# EAGLE board Vorlage ATmega644PA (EAGLE 6.4)
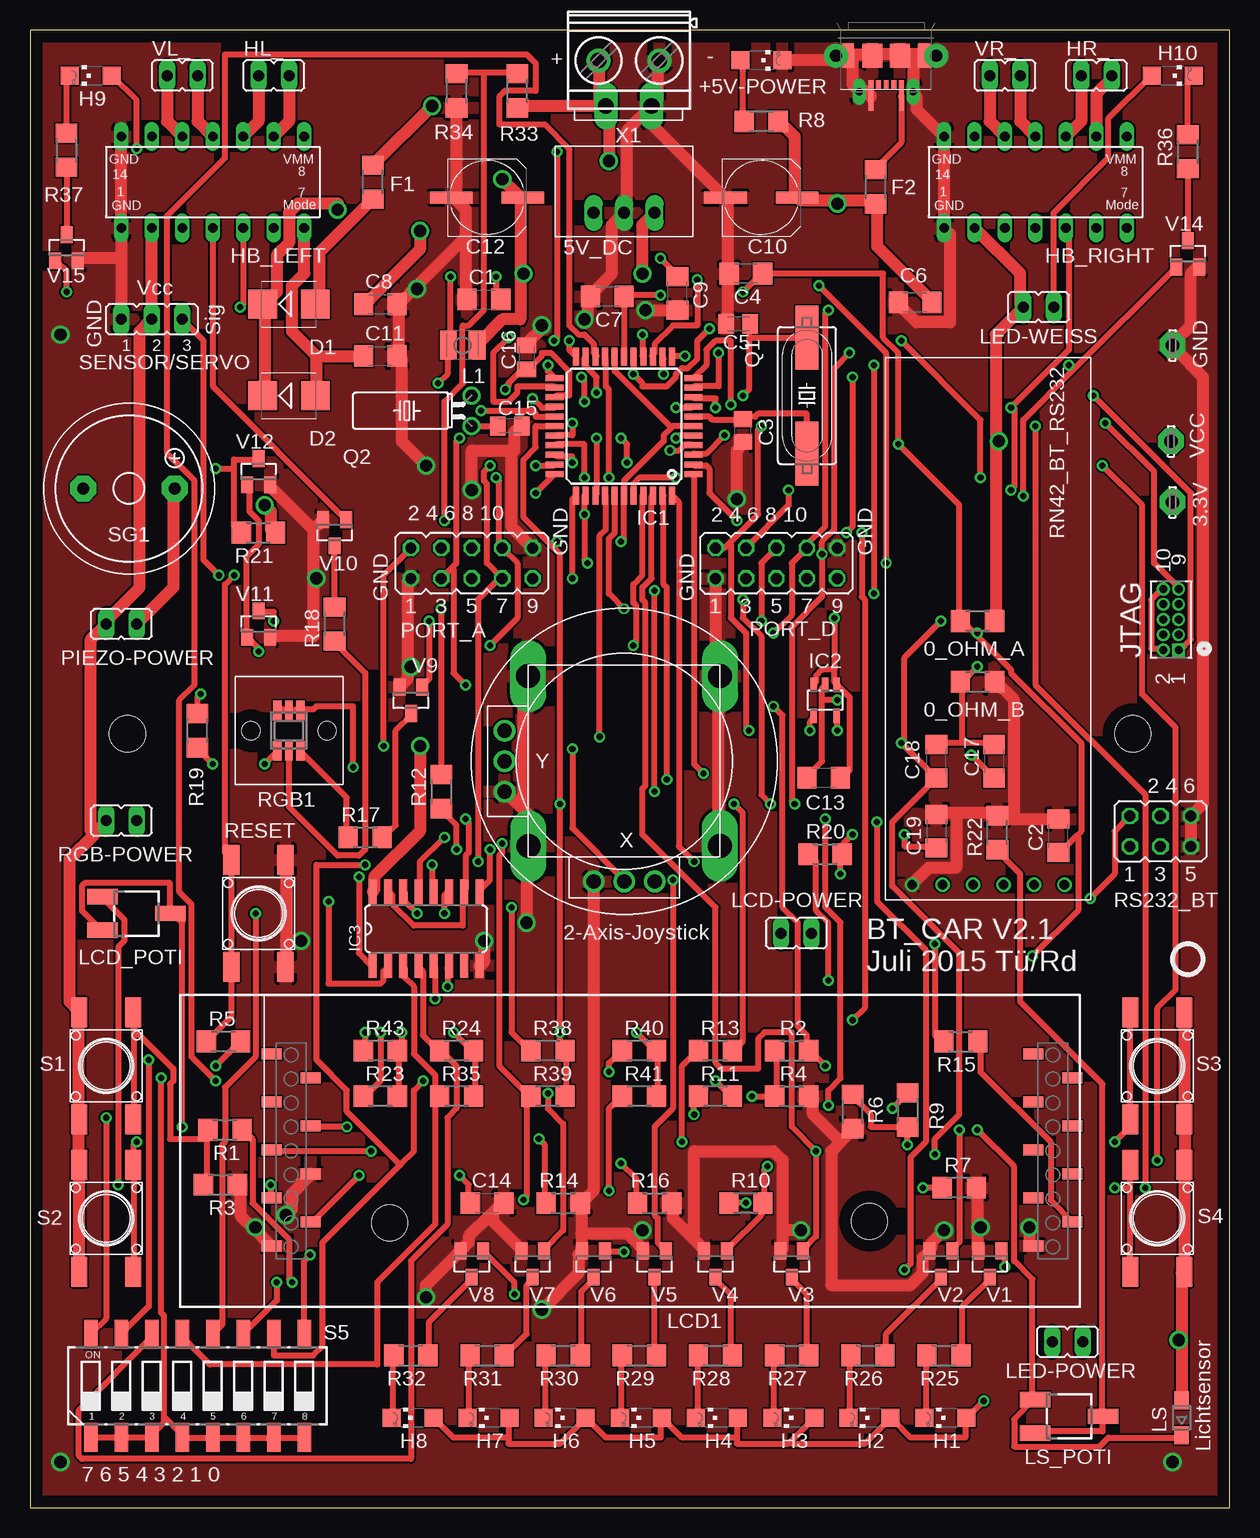
[diagram p0: board, top side]
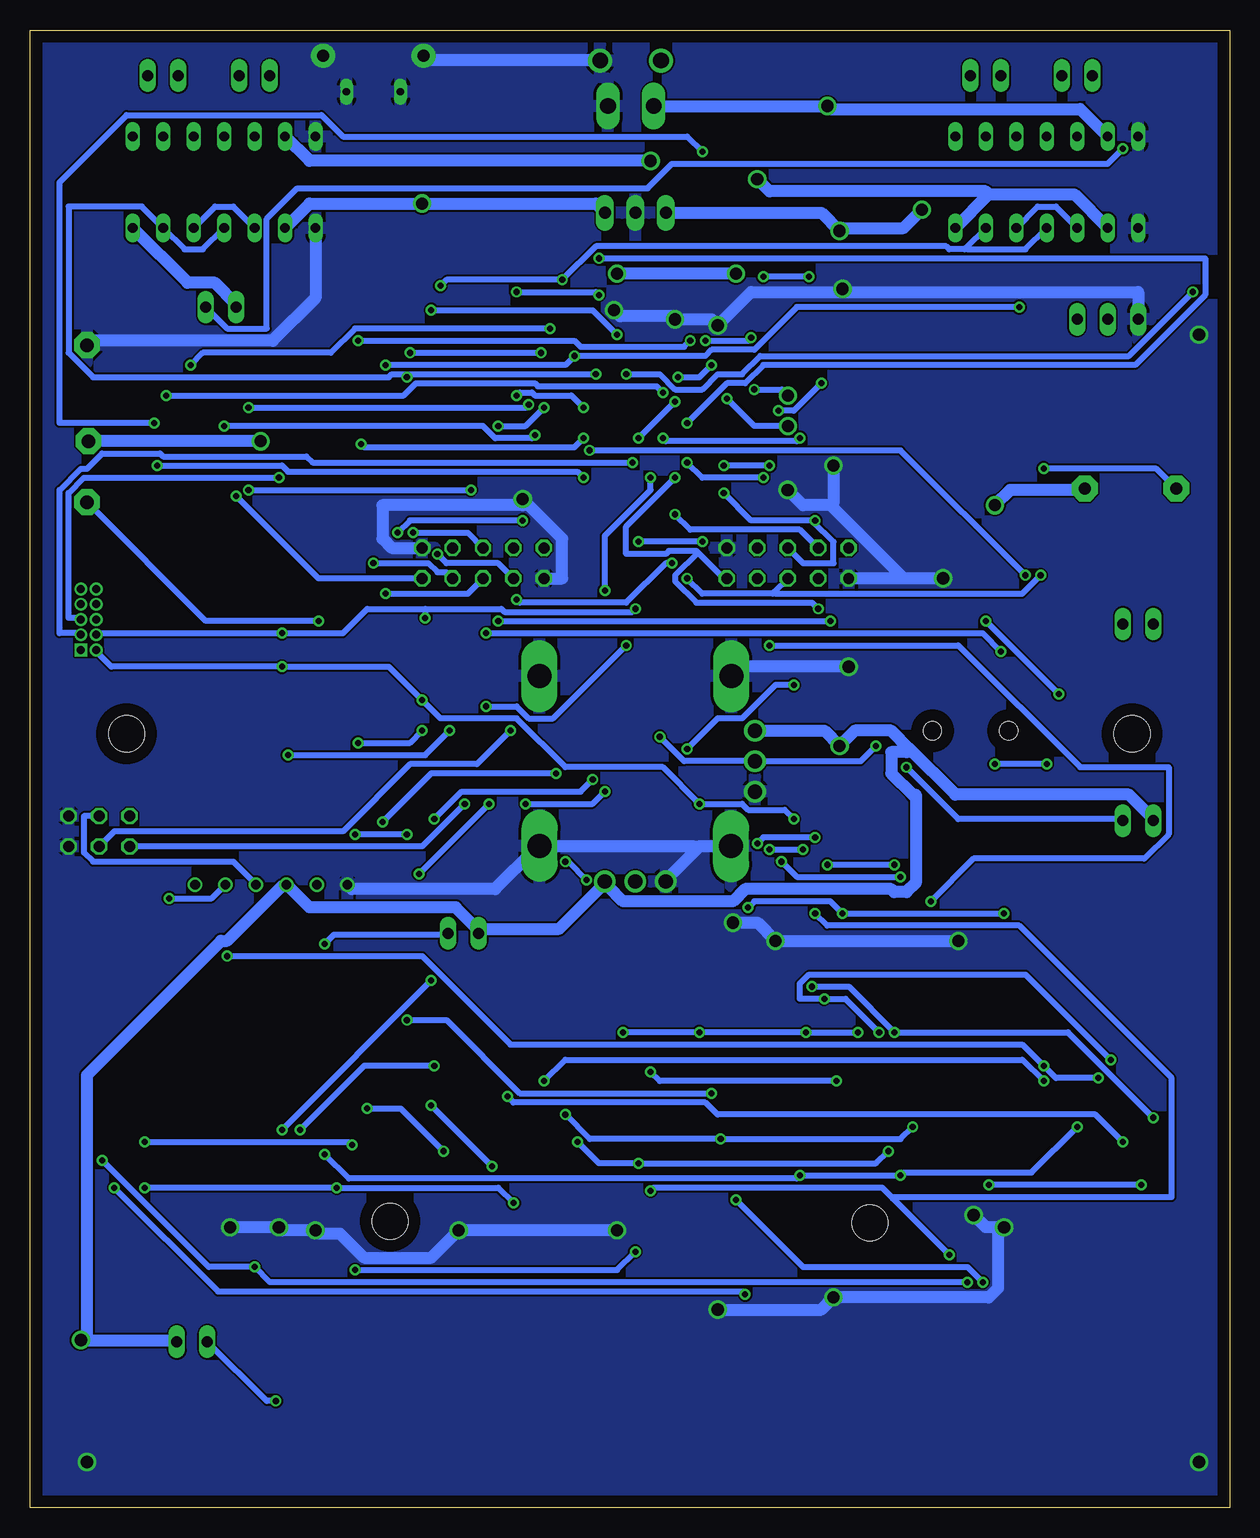
[diagram p1: board, bottom side, seen from below]

Size 100 x 123.18 mm. Coordinates in mm from the lower left corner, seen from the top.
Outline: 0,0 100,0 100,123.18 0,123.18 0,0
Copper layers (1*16): Top 0.035mm / dielectric 1.5mm / Bottom 0.035mm
Design rules "default *": minimum track width 10mil, minimum drill 20mil, track to track 6mil, track to pad 6mil, pad to pad 6mil, via to via 6mil, smd to smd 0mil, copper to edge 40mil, drill to drill 8mil, minimum pad ring 8mil, minimum via ring 8mil, stop-mask expansion 4mil, vias tented up to drill 0mil, thermal gap 10mil
Net classes: 0 default: width 0.508 mm, drill 0.508 mm; 1 POWER: width 1.016 mm, drill 1.016 mm
Holes 3 mm at 8.13,64.52 91.95,64.52 29.97,23.75 69.98,23.88

## Footprints (pad centres in the part's own frame; a part is rotated, then mirrored left to right if it is on the bottom)
R1206 = smd 1.6 x 1.803: 1 -1.422,0; 2 1.422,0
LSP11 = drill 1.118 pad 2.159 octagon: MP 0,0
RECOM_DCDC = drill 1 long: GND 0,0; IN -2.54,0; OUT 2.54,0
CHIPLED_1206 = smd 1.5 x 1.5: A 0,-1.75; C 0,1.75
C1206 = smd 1.6 x 1.8: 1 -1.4,0; 2 1.4,0
C0805 = smd 1.3 x 1.5: 1 -0.95,0; 2 0.95,0
C0805K = smd 1.3 x 1.6: 1 -1,0; 2 1,0
UD-6,3X5,8_NICHICON = smd 3.556 x 1: + 2.985,0; - -2.985,0
SMB = smd 2.4 x 2.4: A 2.2,0; C -2.2,0
F1206 = smd 1.6 x 1.803: 1 -1.422,0; 2 1.422,0
DIL14 = drill 0.813 long: 1 -7.62,-3.81; 2 -5.08,-3.81; 3 -2.54,-3.81; 4 0,-3.81; 5 2.54,-3.81; 6 5.08,-3.81; 7 7.62,-3.81; 8 7.62,3.81; 9 5.08,3.81; 10 2.54,3.81; 11 0,3.81; 12 -2.54,3.81; 13 -5.08,3.81; 14 -7.62,3.81
JP1 = drill 0.914 long: 1 0,-1.27; 2 0,1.27
TQFP44 = smd 1.5 x 0.5: 1 -5.8,4; 2 -5.8,3.2; 3 -5.8,2.4; 4 -5.8,1.6; 5 -5.8,0.8; 6 -5.8,0; 7 -5.8,-0.8; 8 -5.8,-1.6; 9 -5.8,-2.4; 10 -5.8,-3.2; 11 -5.8,-4; 23 5.8,-4; 24 5.8,-3.2; 25 5.8,-2.4; 26 5.8,-1.6; 27 5.8,-0.8; 28 5.8,0; 29 5.8,0.8; 30 5.8,1.6; 31 5.8,2.4; 32 5.8,3.2; 33 5.8,4 | smd 0.5 x 1.5: 12 -4,-5.8; 13 -3.2,-5.8; 14 -2.4,-5.8; 15 -1.6,-5.8; 16 -0.8,-5.8; 17 0,-5.8; 18 0.8,-5.8; 19 1.6,-5.8; 20 2.4,-5.8; 21 3.2,-5.8; 22 4,-5.8; 34 4,5.8; 35 3.2,5.8; 36 2.4,5.8; 37 1.6,5.8; 38 0.8,5.8; 39 0,5.8; 40 -0.8,5.8; 41 -1.6,5.8; 42 -2.4,5.8; 43 -3.2,5.8; 44 -4,5.8
SOT23-DBV = smd 0.55 x 1.2: 1 -0.95,-1.3; 2 0,-1.3; 3 0.95,-1.3; 4 0.95,1.3; 5 -0.95,1.3
SO16 = smd 0.66 x 2.032: 1 -4.445,-3.073; 2 -3.175,-3.073; 3 -1.905,-3.073; 4 -0.635,-3.073; 5 0.635,-3.073; 6 1.905,-3.073; 7 3.175,-3.073; 8 4.445,-3.073; 9 4.445,3.073; 10 3.175,3.073; 11 1.905,3.073; 12 0.635,3.073; 13 -0.635,3.073; 14 -1.905,3.073; 15 -3.175,3.073; 16 -4.445,3.073
SAMTEC_FTS-105-01-L-D = drill 0.66 square: 1 -5.08,-1.27 | drill 0.66: 2 -5.08,0; 3 -3.81,-1.27; 4 -3.81,0; 5 -2.54,-1.27; 6 -2.54,0; 7 -1.27,-1.27; 8 -1.27,0; 9 0,-1.27; 10 0,0
L2825P = smd 1.4 x 2.4: 1 -1.2,0; 2 1.2,0
EADIP203-4SMD = smd 1.67 x 0.89: 1 -29.38,-9.92; 2 -26.13,-7.92; 3 -29.38,-5.92; 4 -26.13,-3.92; 5 -29.38,-1.92; 6 -26.13,0.08; 7 -29.38,2.08; 8 -26.13,4.08; 9 -29.38,6.08; 10 34.12,6.08; 11 37.37,4.08; 12 34.12,2.08; 13 37.37,0.08; 14 34.12,-1.92; 15 37.37,-3.92; 16 34.12,-5.92; 17 37.37,-7.92; 18 34.12,-9.92
3223G = smd 2.54 x 1.27: 1 -2.835,1.4; 2 2.835,0; 3 -2.835,-1.4
SOD232-W = smd 1.5 x 1.2: C 1.45,0; E -1.45,0
JP5Q = drill 0.914 octagon: 1 -5.08,-1.27; 2 -5.08,1.27; 3 -2.54,-1.27; 4 -2.54,1.27; 5 0,-1.27; 6 0,1.27; 7 2.54,-1.27; 8 2.54,1.27; 9 5.08,-1.27; 10 5.08,1.27
HC49UP = smd 5.334 x 1.93: 1 -4.826,0; 2 4.826,0
TC38H = drill 1: 1 -1.27,0; 2 1.27,0
TS42_4PAD = smd 2.54 x 1.4: 1 -4.454,2.25; 2 4.454,2.25; 3 -4.454,-2.25; 4 4.454,-2.25
LED_MIT_DIFUSOR = smd 0.7 x 1.65: 1 -0.95,-1.675; 3 0.95,-1.675; 4 0.95,1.675; 6 -0.95,1.675 | smd 0.6 x 1.65: 2 0,-1.675; 5 0,1.675 | hole 1.5: -3.175,0; 3.175,0
RN42BT_RS232 = drill 0.8: 1 22.86,-6.35; 2 22.86,-3.81; 3 22.86,-1.27; 4 22.86,1.27; 5 22.86,3.81; 6 22.86,6.35
JP3Q = drill 0.914 octagon: 1 -2.54,-1.27; 2 -2.54,1.27; 3 0,-1.27; 4 0,1.27; 5 2.54,-1.27; 6 2.54,1.27
CTS-219-08 = smd 1.13 x 2.44: 1 -8.89,-4.3; 2 -6.35,-4.3; 3 -3.81,-4.3; 4 -1.27,-4.3; 5 1.27,-4.3; 6 3.81,-4.3; 7 6.35,-4.3; 8 8.89,-4.3; 9 8.89,4.3; 10 6.35,4.3; 11 3.81,4.3; 12 1.27,4.3; 13 -1.27,4.3; 14 -3.81,4.3; 15 -6.35,4.3; 16 -8.89,4.3
JP2 = drill 0.914 long: 1 -2.54,0; 2 0,0; 3 2.54,0
F/TMB = drill 1.016 pad 2.159 octagon: + 3.81,0; - -3.81,0
47589-0001 = smd 2.54 x 0.4: 1 3.308,1.275; 5 3.308,-1.275 | smd 0.762 x 0.4: 2 2.419,0.65; 3 2.419,0; 4 2.419,-0.65 | drill 1 pad 2: CASING1 0,4.175; CASING2 0,-4.175 | drill 0.6 pad 1.1 long: CASING3 3,2.25; CASING4 3,-2.25 | smd 2.032 x 1.016: CASING5 0,3.175; CASING8 0,-3.175 | smd 2.032 x 1.651: CASING6 0,1.143; CASING7 0,-1.143
2-AXIS-JOYSTICK = drill 2 long: CASE1 -8.008,7.077; CASE2 -7.978,-7.077; CASE3 8.008,7.077; CASE4 7.987,-7.067 | drill 1.2: L/R+ 2.54,-10.03; L/R- -2.54,-10.03; L/R_M 0,-10.03; U/D+ -9.97,2.54; U/D- -9.97,-2.54; U/D_M -9.97,0
SOT23 = smd 1 x 1.4: 1 -0.95,-1.1; 2 0.95,-1.1; 3 0,1.1
MKDSN1,5/2-5,08 = drill 1.3 pad 2: 1.1 -2.561,0.025; 2.1 2.519,0.025 | drill 1.3 long: 1.2 -1.905,3.81; 2.2 1.905,3.81

## Placement (x,y rotation side)
0_OHM_A  0 Ohm  [R1206]  78.99,73.91 180 top
0_OHM_B  0 Ohm  [R1206]  78.99,68.83 180 top
3.3V  3.3V  [LSP11]  95.25,83.82 90 top
5V_DC  RECOM_DCDC  [RECOM_DCDC]  49.53,107.95 0 top
+5V-POWER  Gruen  [CHIPLED_1206]  60.96,120.65 270 top
C1  100nF  [C1206]  37.85,100.71 0 top
C2  100nF  [C1206]  85.72,56.01 90 top
C3  18pF  [C0805]  59.44,89.79 90 top
C4  100nF  [C1206]  59.69,102.87 180 top
C5  18pF  [C0805K]  59.05,98.68 180 top
C6  100nF  [C1206]  73.79,100.46 180 top
C7  100nF  [C1206]  48.13,100.97 180 top
C8  100nF  [C1206]  29.21,100.33 0 top
C9  100nF  [C1206]  53.98,101.22 90 top
C10  100uF  [UD-6,3X5,8_NICHICON]  60.96,109.22 0 top
C11  100nF  [C1206]  29.21,96.01 0 top
C12  100uF  [UD-6,3X5,8_NICHICON]  38.1,109.22 0 top
C13  1uF  [C1206]  66.17,60.83 180 top
C14  100nF  [C1206]  38.1,25.4 0 top
C15  12pF  [C0805K]  40.01,90.17 0 top
C16  12pF  [C0805K]  41.4,95.89 90 top
C17  100nF  [C1206]  80.39,62.23 90 top
C18  1uF  [C1206]  75.56,62.23 90 top
C19  1uF  [C1206]  75.56,56.39 270 top
D1  MBRS130LT3  [SMB]  21.59,100.33 0 top
D2  MBRS130LT3  [SMB]  21.59,92.71 0 top
F1  1.0A  [F1206]  28.57,110.49 270 top
F2  500mA  [F1206]  70.48,110.11 270 top
GND  3.3V  [LSP11]  95.25,96.9 90 top
H1  rot  [CHIPLED_1206]  76.33,7.49 90 top
H2  blau  [CHIPLED_1206]  69.98,7.49 90 top
H3  rot  [CHIPLED_1206]  63.63,7.49 90 top
H4  blau  [CHIPLED_1206]  57.28,7.49 90 top
H5  rot  [CHIPLED_1206]  50.93,7.49 90 top
H6  blau  [CHIPLED_1206]  44.58,7.49 90 top
H7  rot  [CHIPLED_1206]  38.23,7.49 90 top
H8  blau  [CHIPLED_1206]  31.88,7.49 90 top
H9  weiss  [CHIPLED_1206]  5.08,119.38 90 top
H10  weiss  [CHIPLED_1206]  95.25,119.38 270 top
HB_LEFT  DRV8835  [DIL14]  15.24,110.49 0 top
HB_RIGHT  DRV8835  [DIL14]  83.82,110.49 0 top
HL_  [JP1]  20.32,119.38 270 top
HR_  [JP1]  88.9,119.38 270 top
IC1  ATmega644PA  [TQFP44]  49.53,90.17 180 top
IC2  LP2985-XXDBVR  [SOT23-DBV]  66.29,67.31 180 top
IC3  74AC165D  [SO16]  33.02,48.26 0 top
JTAG  FTS-105-01-L-D  [SAMTEC_FTS-105-01-L-D]  94.49,76.58 90 top
L1  10uH  [L2825P]  36.07,96.9 180 top
LCD1  EADIP203-4_SMD  [EADIP203-4SMD]  49.53,31.75 0 top
LCD-POWER  [JP1]  63.88,47.88 270 top
LCD_POTI  2k5  [3223G]  8.89,49.53 0 top
LED-POWER  [JP1]  86.49,13.84 90 top
LED-WEISS  [JP1]  84.07,100.08 270 top
LS  ALS-PT17  [SOD232-W]  96.01,7.49 90 top
LS_POTI  25k  [3223G]  86.61,7.62 0 top
PIEZO-POWER  [JP1]  7.62,73.66 270 top
PORT_A  [JP5Q]  36.83,78.74 0 top
PORT_D  [JP5Q]  62.23,78.74 0 top
Q1  16MHz  [HC49UP]  64.77,92.71 270 top
Q2  32.768kHz  [TC38H]  36.83,91.44 90 top
R1  1k  [R1206]  16.26,31.5 180 top
R2  1k  [R1206]  63.5,38.1 180 top
R3  100k  [R1206]  15.88,26.92 180 top
R4  100k  [R1206]  63.5,34.29 180 top
R5  10k  [R1206]  16.13,38.86 0 top
R6  100k  [R1206]  68.58,33.02 270 top
R7  100k  [R1206]  77.47,26.67 0 top
R8  1k  [R1206]  60.96,115.57 0 top
R9  1k  [R1206]  73.15,33.15 90 top
R10  1k  [R1206]  59.69,25.4 0 top
R11  1k  [R1206]  57.15,34.29 0 top
R12  1k  [R1206]  34.29,59.69 90 top
R13  1k  [R1206]  57.15,38.1 0 top
R14  2k  [R1206]  44.45,25.4 180 top
R15  150R  [R1206]  77.6,38.86 180 top
R16  2k  [R1206]  52.07,25.4 180 top
R17  150R  [R1206]  27.94,55.88 180 top
R18  150R  [R1206]  25.4,73.66 270 top
R19  150R  [R1206]  13.97,64.77 270 top
R20  100k  [R1206]  66.29,54.48 180 top
R21  1k  [R1206]  19.05,81.28 180 top
R22  10k  [R1206]  80.64,56.26 270 top
R23  100k  [R1206]  29.21,34.29 0 top
R24  100k  [R1206]  35.56,38.1 0 top
R25  150R  [R1206]  76.2,12.7 180 top
R26  150R  [R1206]  69.85,12.7 180 top
R27  150R  [R1206]  63.5,12.7 180 top
R28  150R  [R1206]  57.15,12.7 180 top
R29  150R  [R1206]  50.8,12.7 180 top
R30  150R  [R1206]  44.45,12.7 180 top
R31  150R  [R1206]  38.1,12.7 180 top
R32  150R  [R1206]  31.75,12.7 180 top
R33  100k  [R1206]  40.64,118.11 270 top
R34  100k  [R1206]  35.56,118.11 90 top
R35  100k  [R1206]  35.56,34.29 0 top
R36  150R  [R1206]  96.52,113.03 90 top
R37  150R  [R1206]  3.05,113.16 90 top
R38  100k  [R1206]  43.18,38.1 0 top
R39  100k  [R1206]  43.18,34.29 0 top
R40  100k  [R1206]  50.8,38.1 0 top
R41  100k  [R1206]  50.8,34.29 0 top
R43  100k  [R1206]  29.21,38.1 0 top
RESET  [TS42_4PAD]  19.05,49.53 270 top
RGB1  [LED_MIT_DIFUSOR]  21.59,64.77 0 top
RGB-POWER  [JP1]  7.62,57.28 270 top
RN1  RN42_BT_RS232  [RN42BT_RS232]  79.88,74.8 270 top
RS232_BT  [JP3Q]  94.23,56.39 0 top
S1  [TS42_4PAD]  6.35,36.83 270 top
S2  [TS42_4PAD]  6.35,24.13 270 top
S3  [TS42_4PAD]  93.98,36.83 270 top
S4  [TS42_4PAD]  93.98,24.13 270 top
S5  219-08  [CTS-219-08]  13.97,10.16 0 top
SENSOR/SERVO  [JP2]  10.16,99.06 0 top
SG1  F/TMB  [F/TMB]  8.26,84.96 0 top
U$1  MICRO-USB  [47589-0001]  71.37,121.03 270 top
U$6  2-AXIS-JOYSTICK  [2-AXIS-JOYSTICK]  49.53,62.23 0 top
V1  PMV20EN  [SOT23]  80.01,20.32 180 top
V2  PMV20EN  [SOT23]  75.95,20.32 180 top
V3  PMV20EN  [SOT23]  63.5,20.32 180 top
V4  PMV20EN  [SOT23]  57.15,20.32 180 top
V5  PMV20EN  [SOT23]  52.07,20.32 180 top
V6  PMV20EN  [SOT23]  46.99,20.32 180 top
V7  PMV20EN  [SOT23]  41.91,20.32 180 top
V8  PMV20EN  [SOT23]  36.83,20.32 180 top
V9  PMV20EN  [SOT23]  31.75,67.31 180 top
V10  PMV20EN  [SOT23]  25.4,81.28 180 top
V11  PMV20EN  [SOT23]  19.05,73.66 0 top
V12  PMV20EN  [SOT23]  19.05,86.36 0 top
V14  PMV20EN  [SOT23]  96.52,104.52 0 top
V15  PMV20EN  [SOT23]  3.05,105.03 0 top
VCC  3.3V  [LSP11]  95.12,88.9 90 top
VL_  [JP1]  12.7,119.38 270 top
VR_  [JP1]  81.28,119.38 270 top
X1  [MKDSN1,5/2-5,08]  49.91,120.65 180 top

## Library data of the parts
0_OHM_A 0_OHM_B C1-C9 C11 C13-C19 L1 R1-R41 R43 = rcl
3.3V GND VCC = solpad
5V_DC = DCDC
+5V-POWER H1-H10 RGB1 = led
C10 C12 = rcl2
D1 D2 = diode
F1 F2 = fuse
HB_LEFT HB_RIGHT = HBridge
HL_ HR_ LCD-POWER LED-POWER LED-WEISS PIEZO-POWER PORT_A PORT_D RGB-POWER RS232_BT SENSOR/SERVO VL_ VR_ = jumper
IC1 = atmel; MPN: ATMEGA644PV-10AU; OC_FARNELL: 1455123; OC_NEWARK: 58M3748
IC2 RESET S1-S4 = SmartPrj
IC3 = 74xx-eu
JTAG = JTAG_10pol_50mil; DESCRIPTION: CONN HEADER, 1.27MM, THRU HOLE, 10WAY; MPN: FTS-105-01-L-D; OCFARNELL: 1667728; OCNEWARK: 11P4652; PACKAGE: HEADER, 1.27MM, THRU HOLE, 10WAY; SUPPLIER: Samtec
LCD1 = display-lcd
LCD_POTI LS_POTI = pot
LS = Lichtsensor
Q1 Q2 = crystal; OC_FARNELL: unknown; OC_NEWARK: unknown
RN1 = RN42_BT_RS232
S5 = switch-dil; OC_FARNELL: unknown; OC_NEWARK: unknown
SG1 = buzzer; OC_FARNELL: unknown; OC_NEWARK: unknown
U$1 = con-molex-usb
U$6 = Joystick_2-Axis
V1-V12 V14 V15 = transistor-fet-mit-BSS138
X1 = con_sirius; MPN: MKDSN 1,5/2-5.08; OC_FARNELL: 1792903; OC_NEWARK: 30M2397

## Nets
3.3V: 3.3V.MP C14.1 C18.1 IC2.5 LCD1.2 LCD_POTI.2 LCD_POTI.3
+5V: 0_OHM_A.2 C2.1 C4.1 C7.1 C13.1 IC1.5 IC1.17 IC1.38 IC2.1 IC2.3 JTAG.4 R5.2 S5.1 S5.2 S5.3 S5.4 S5.5 S5.6 S5.7 S5.8
DGND: 0_OHM_B.2 C13.2 C17.2 C18.2 IC1.6 IC1.18 IC1.28 IC1.39 IC2.2 IC3.10 IC3.15 JTAG.2 JTAG.10 R23.2 R24.2 R35.2 R38.2 R39.2 R40.2 R41.2 R43.2
GND [POWER]: 0_OHM_B.1 5V_DC.GND +5V-POWER.C C1.1 C2.2 C3.1 C4.2 C5.2 C6.2 C7.2 C8.2 C9.1 C10.- C11.2 C12.- C14.2 C15.2 C16.2 C19.1 GND.MP HB_LEFT.1 HB_LEFT.14 HB_RIGHT.1 HB_RIGHT.14 IC3.8 LCD1.1 LCD1.4 LCD1.18 PORT_A.1 PORT_A.10 PORT_D.1 PORT_D.10 R3.1 R4.1 R6.2 R7.2 R14.1 R16.1 R22.1 R34.1 RESET.1 RESET.2 RN1.1 RS232_BT.5 RS232_BT.6 SENSOR/SERVO.1 U$1.5 U$1.CASING1 U$1.CASING2 U$1.CASING3 U$1.CASING4 U$1.CASING5 U$1.CASING6 U$1.CASING7 U$1.CASING8 U$6.CASE1 U$6.CASE2 U$6.CASE3 U$6.CASE4 U$6.L/R- U$6.U/D- V1.2 V2.2 V3.2 V4.2 V5.2 V6.2 V7.2 V8.2 V9.2 V10.2 V11.2 V12.2 V14.2 V15.2 X1.1.1 X1.1.2
N$1: R19.2 RGB1.1
N$2: R18.2 RGB1.2
N$3: F2.1 U$1.1
N$4: H9.A H10.A LED-WEISS.2
N$5: H2.C R26.2
N$6: H1.C R25.2
N$7: R25.1 V1.3
N$8: R26.1 V2.3
N$9 [POWER]: D1.A F1.2
N$10: H10.C R36.2
N$11: R17.2 RGB1.3
N$12: LCD-POWER.2 R15.2
N$13: H1.A H2.A H3.A H4.A H5.A H6.A H7.A H8.A LED-POWER.2
N$14: RN1.5 RS232_BT.2
N$15: RN1.4 RS232_BT.4
N$16: R21.2 SG1.- V12.3
N$17: IC3.6 R43.1 S5.16
N$18: IC3.5 R23.1 S5.15
N$19: LS.E LS_POTI.1 R20.2
N$20: LS_POTI.2 LS_POTI.3 R22.2
N$21: R1.2 R3.2 S1.1 S1.2
N$22: R2.2 R4.2 S2.1 S2.2
N$23: R7.1 R10.1 S4.3 S4.4
N$24: R6.1 R9.1 S3.3 S3.4
N$25: H4.C R28.2
N$26: H3.C R27.2
N$27: R17.1 V9.3
N$28: R18.1 V10.3
N$29: R19.1 V11.3
N$30: R27.1 V3.3
N$31: IC3.4 R24.1 S5.14
N$32: R28.1 V4.3
N$33: H9.C R37.2
N$34: LCD1.3 LCD_POTI.1
N$35: C1.2 IC1.27 L1.2
N$36: C5.1 IC1.8 Q1.1
N$37: C3.2 IC1.7 Q1.2
N$38: C9.2 IC1.29
N$39: LCD1.6 R11.1 R14.2
N$40: LCD1.5 R13.1 R16.2
N$41: R37.1 V15.3
N$42: H6.C R30.2
N$43: H5.C R29.2
N$44: R29.1 V5.3
N$45: R30.1 V6.3
N$46: R36.1 V14.3
N$47 [POWER]: HB_LEFT.12 VL_.1
N$48: H8.C R32.2
N$49: H7.C R31.2
N$50: R31.1 V7.3
N$51: R32.1 V8.3
N$52 [POWER]: HB_LEFT.11 VL_.2
N$53 [POWER]: HB_LEFT.10 HL_.1
N$54 [POWER]: HB_LEFT.9 HL_.2
N$55 [POWER]: HB_RIGHT.12 VR_.1
N$56 [POWER]: HB_RIGHT.11 VR_.2
N$57 [POWER]: HB_RIGHT.10 HR_.1
N$58 [POWER]: HB_RIGHT.9 HR_.2
N$59: IC3.3 R35.1 S5.13
N$60: +5V-POWER.A R8.1
N$61: IC3.14 R38.1 S5.12
N$62: IC3.13 R39.1 S5.11
N$63: IC3.12 R40.1 S5.10
N$64: IC3.11 R41.1 S5.9
N$65 [POWER]: PIEZO-POWER.2 R21.1 SG1.+
N$66: IC3.9 R12.1
N$70: C17.1 IC2.4
N$75 [POWER]: 5V_DC.IN C8.1 D1.C D2.C
N$88: RGB1.4 RGB1.5 RGB1.6 RGB-POWER.2
N$95: LCD1.17 R15.1
PA0: IC1.37 PORT_A.2 U$6.U/D_M
PA1: IC1.36 PORT_A.3 U$6.L/R_M
PA2: C19.2 IC1.35 PORT_A.4 R20.1
PA3: IC1.34 PORT_A.5 SENSOR/SERVO.3
PA4: IC1.33 PORT_A.6 R33.1 R34.2
PA5: IC1.32 IC3.1 PORT_A.7
PA6: IC1.31 IC3.2 PORT_A.8
PA7: IC1.30 PORT_A.9 R12.2
PB0: IC1.40 R1.1 V1.1
PB1: IC1.41 R2.1 V2.1
PB2: IC1.42 R9.2 V3.1
PB3: IC1.43 R10.2 V4.1
PB4: IC1.44 V5.1
PB5: IC1.1 V6.1
PB6: IC1.2 V7.1
PB7: IC1.3 V8.1
PC0: IC1.19 R13.2
PC1: IC1.20 R11.2
PC2: IC1.21 JTAG.1
PC3: IC1.22 JTAG.5
PC4: IC1.23 JTAG.3
PC5: IC1.24 JTAG.9
PC6: C16.1 IC1.25 Q2.2
PC7: C15.1 IC1.26 Q2.1
PD0: IC1.9 PORT_D.2 RS232_BT.3
PD1: IC1.10 PORT_D.3 RS232_BT.1
PD2: HB_RIGHT.3 HB_RIGHT.5 IC1.11 PORT_D.4
PD3: HB_LEFT.3 HB_LEFT.5 IC1.12 PORT_D.5
PD4: HB_RIGHT.4 HB_RIGHT.6 IC1.13 PORT_D.6 V9.1
PD5: HB_LEFT.4 HB_LEFT.6 IC1.14 PORT_D.7 V10.1
PD6: IC1.15 PORT_D.8 V11.1 V12.1
PD7: IC1.16 PORT_D.9 V14.1 V15.1
RESET: IC1.4 R5.1 RESET.3 RESET.4
V_AKKU [POWER]: F1.1 HB_LEFT.13 HB_RIGHT.13 R33.2 X1.2.1 X1.2.2
VCC [POWER]: 0_OHM_A.1 5V_DC.OUT C6.1 C10.+ C11.1 C12.+ D2.A F2.2 HB_LEFT.2 HB_LEFT.7 HB_RIGHT.2 HB_RIGHT.7 IC3.16 L1.1 LCD-POWER.1 LED-POWER.1 LED-WEISS.1 LS.C PIEZO-POWER.1 R8.2 RGB-POWER.1 RN1.3 S1.3 S1.4 S2.3 S2.4 S3.1 S3.2 S4.1 S4.2 SENSOR/SERVO.2 U$6.L/R+ U$6.U/D+ VCC.MP

## Tracks (layer width: path | path; a pad name or v marks a point on that pad's centre or on a via)
3.3V  (via drill 0.51)
  Top 0.508: v67.31,64.77 67.31,65.79 IC2.5 | v75.95,73.91 72.9,70.87 72.9,63.75 v72.64,63.75 75.44,60.96 C18.1 75.44,60.71 71.88,57.15 71.88,51.82 77.47,46.23 77.47,32.77 75.44,30.73 v75.44,29.46 | LCD_POTI.3 5.84,48.26 4.32,49.78 4.32,51.82 4.57,52.07 11.68,52.07 11.68,49.53 LCD_POTI.2 11.94,49.53 12.7,48.77 v12.7,31.75 | v27.43,27.69 23.62,23.88 LCD1.2 | v35.81,27.69 36.58,26.92 36.58,25.4 C14.1
  Bottom 0.508: v67.31,64.77 68.33,63.75 v72.64,63.75 | 3.3V.MP 85.34,73.91 v75.95,73.91 | v12.7,31.75 16.51,27.94 27.18,27.94 v27.43,27.69 v35.81,27.69 36.07,27.43 73.41,27.43 v75.44,29.46
+5V  (via drill 0.51)
  Top 0.508: 67.06,69.85 66.04,69.85 65.53,69.34 65.53,68.83 IC2.3 | 67.06,69.85 67.06,68.83 IC2.1 67.31,68.58 68.33,67.56 68.33,61.47 67.82,60.96 C13.1 | v49.53,74.93 48.26,76.2 48.26,80.77 48.77,81.28 48.77,84.33 IC1.38 | v67.06,74.17 67.06,69.85 | 7.62,5.84 5.08,5.84 S5.1 | v15.49,36.83 17.53,38.86 R5.2 | v10.92,35.81 10.92,16.26 11.18,16 11.18,7.62 | 11.18,7.62 11.18,7.11 10.16,6.1 S5.3 10.16,5.84 7.62,5.84 | 11.18,7.62 12.7,6.1 S5.4 12.7,5.84 15.24,5.84 | 15.24,5.84 17.78,5.84 | 15.24,5.84 S5.5 | 17.78,5.84 20.32,5.84 | 17.78,5.84 S5.6 | 20.32,5.84 22.86,5.84 S5.8 | 20.32,5.84 S5.7 | 7.62,5.84 S5.2 | IC1.17 49.53,100.84 C7.1 49.78,101.09 v52.58,101.09 | v53.85,89.15 53.85,89.41 55.12,89.41 IC1.5 | 87.25,56.01 87.63,56.39 87.63,63.75 81.79,69.6 81.79,69.85 78.87,72.77 | 87.25,56.01 85.85,54.61 C2.1 | 78.87,72.77 77.72,73.91 0_OHM_A.2 77.47,73.91 77.47,83.57 v72.39,88.65 72.39,96.27 71.12,97.54 71.12,102.87 C4.1 60.96,102.87 v59.44,101.35 | v83.57,45.97 87.38,49.78 87.38,55.88 87.25,56.01 | v78.99,72.9 78.87,72.77
  Bottom 0.508: v49.53,74.93 49.78,74.68 60.45,74.68 60.71,74.93 67.06,74.93 | 67.06,74.93 71.88,74.93 73.91,72.9 v78.99,72.9 94.49,72.9 JTAG.4 | 67.06,74.93 v67.06,74.17 | v10.92,35.81 14.48,35.81 v15.49,36.83 17.27,38.61 59.94,38.61 67.31,45.97 v83.57,45.97 | v53.85,89.15 54.61,88.39 72.14,88.39 v72.39,88.65 | v52.58,101.09 52.83,101.35 v59.44,101.35
DGND  (via drill 0.51)
  Top 0.508: 66.04,67.31 66.04,62.23 64.77,60.96 C13.2 | 66.04,67.31 66.04,68.33 66.29,68.58 IC2.2 | JTAG.2 94.49,71.63 93.47,71.63 93.47,75.69 94.49,76.71 JTAG.10 | 77.72,63.75 80.26,63.75 C17.2 | 77.72,63.75 75.69,63.75 C18.2 | 77.72,63.75 77.72,68.83 | 77.72,68.83 v78.99,70.1 | 77.72,68.83 0_OHM_B.2 | v67.31,67.31 66.04,67.31 | R41.2 52.32,34.29 52.32,38.1 R40.2 52.07,38.1 v50.55,39.62 | 30.73,38.1 30.73,34.29 R23.2 | R35.2 37.08,34.29 37.08,38.1 R24.2 36.83,38.1 v35.31,39.62 | 30.73,38.1 30.99,38.35 v30.99,39.62 | 30.73,38.1 R43.2 | 53.47,90.04 53.59,90.17 IC1.6 | 53.47,90.04 52.83,89.41 52.83,88.9 49.53,85.6 IC1.39 49.53,80.77 v49.28,80.52 | 53.47,90.04 48.77,94.74 48.77,95.76 IC1.18 | IC3.15 29.97,51.31 30.23,51.05 30.23,50.29 32,48.51 36.07,48.51 36.07,51.31 IC3.10 36.32,51.56 36.32,54.36 36.58,54.61 36.58,57.15 v36.32,57.4 | IC1.28 42.16,90.17 42.16,88.39 41.15,87.38 41.15,82.55 43.56,80.14 | 43.56,80.14 44.2,79.5 v44.2,58.67 v44.2,39.62 44.2,38.35 44.45,38.1 R38.2 44.7,38.1 44.7,34.29 R39.2 | 43.56,80.14 v43.94,80.52
  Bottom 0.508: JTAG.2 94.49,71.37 93.22,70.1 v78.99,70.1 70.1,70.1 v67.31,67.31 65.79,65.79 59.44,65.79 55.37,61.72 47.24,61.72 v44.2,58.67 40.64,58.67 40.13,58.17 37.08,58.17 v36.32,57.4 | v30.99,39.62 v35.31,39.62 v44.2,39.62 v50.55,39.62 | v43.94,80.52 v49.28,80.52
GND  (via drill 1.02)
  Top 1.016: 55.12,22.61 53.59,24.13 53.59,25.4 R16.1 | 55.12,22.61 56.13,21.59 V4.2 | 62.74,23.11 62.74,28.96 61.98,29.72 55.37,29.72 55.37,22.86 55.12,22.61 | 62.74,23.11 62.74,21.59 V3.2 | 78.99,23.37 78.99,26.67 R7.2 | 78.99,23.37 78.99,21.59 V1.2 | v83.31,23.37 83.31,22.1 83.57,21.84 LCD1.18 | v79.25,23.37 78.99,23.37 | 67.56,30.48 68.58,31.5 R6.2 | 67.56,30.48 66.8,29.72 66.8,18.54 73.41,18.54 74.42,19.56 74.42,20.83 74.93,21.34 V2.2 75.18,21.84 75.18,22.1 v76.2,23.11 | 67.56,30.48 65.28,32.77 65.28,34.04 65.02,34.29 R4.1 | v64.26,23.11 62.74,23.11 | 57.66,69.34 U$6.CASE3 | v58.93,84.07 58.93,88.14 59.44,88.65 C3.1 | PORT_D.1 57.15,70.36 57.66,69.85 U$6.CASE3 | 38.35,24.38 39.37,25.4 C14.2 | 38.35,24.38 36.58,22.61 36.58,22.1 36.07,21.59 V8.2 35.56,21.08 33.02,18.54 v33.02,17.53 | V7.2 40.89,21.59 38.61,23.88 38.61,24.13 38.35,24.38 | 18.67,23.24 17.53,24.38 17.53,26.92 R3.1 | 18.67,23.24 20.07,21.84 LCD1.1 | v21.34,24.38 21.84,24.89 21.84,26.16 23.37,27.69 LCD1.4 | v18.8,23.37 18.67,23.24 | 77.22,57.91 80.52,57.91 R22.1 81.03,57.4 82.04,57.4 | 77.22,57.91 75.69,57.91 C19.1 | 82.04,57.4 85.6,57.4 C2.2 | 82.04,57.4 82.04,67.31 80.52,68.83 0_OHM_B.1 | RN1.1 74.93,53.34 77.22,53.34 77.22,57.91 | 57.66,55.12 U$6.CASE4 57.4,55.63 57.4,68.83 U$6.CASE3 | 41.66,69.34 U$6.CASE1 41.4,68.83 41.15,68.58 41.15,58.67 40.89,58.42 | 21.34,47.24 21.34,53.85 RESET.1 | 21.34,47.24 21.34,45.21 RESET.2 | 45.97,22.86 45.97,25.4 R14.1 46.23,25.65 46.99,26.42 U$6.L/R- | 45.97,22.86 45.97,21.59 V6.2 45.72,21.08 45.72,19.56 v42.67,16.51 | 50.29,22.35 49.78,22.86 45.97,22.86 | 50.29,22.35 51.05,21.59 V5.2 | v37.85,47.24 37.85,45.47 37.59,45.21 IC3.8
  Top 1.016: v41.4,48.77 41.4,55.12 U$6.CASE2 | 40.89,58.42 41.4,57.91 41.4,55.63 U$6.CASE2 | 40.89,58.42 39.62,59.69 U$6.U/D- | v22.61,47.24 21.34,47.24 | 41.66,55.12 U$6.CASE2 | 50.29,22.35 v51.05,23.11 | RS232_BT.5 RS232_BT.6 97.79,58.67 97.79,94.23 95.5,96.52 GND.MP 95.25,97.03 96.77,98.55 96.77,102.87 97.28,103.38 V14.2 | 40.13,87.88 40.39,88.14 40.39,89.66 40.89,90.17 C15.2 | 40.13,87.88 40.13,81.79 PORT_A.10 | 31.5,70.1 31.5,77.22 PORT_A.1 | 31.5,70.1 31.5,69.09 30.99,68.58 V9.2 | 23.62,81.53 23.62,77.47 | 23.62,77.47 23.62,72.64 20.07,72.64 V11.2 | 23.62,81.53 24.38,82.3 V10.2 | 23.62,81.53 20.07,85.09 V12.2 | v23.88,77.47 23.62,77.47 | v36.83,84.84 36.83,88.14 39.88,88.14 40.13,87.88 | +5V-POWER.C 67.06,120.65 67.06,120.9 U$1.CASING2 67.56,121.16 68.07,121.16 U$1.CASING8 | U$1.CASING8 68.58,121.16 70.1,121.16 U$1.CASING7 70.61,121.16 72.14,121.16 U$1.CASING6 72.64,121.16 73.66,121.16 | U$1.CASING8 68.58,120.65 68.58,118.62 69.09,118.11 U$1.CASING4 69.6,118.11 70.1,117.6 U$1.5 | C6.2 72.39,100.33 73.91,98.81 76.71,98.81 76.71,106.17 HB_RIGHT.1 HB_RIGHT.14 73.91,116.59 73.91,117.6 U$1.CASING3 73.66,118.11 73.66,121.16 | 73.66,121.16 74.42,121.16 U$1.CASING5 74.93,121.16 75.44,121.16 U$1.CASING1 | 36.32,105.66 36.32,108.2 35.31,109.22 C12.- 35.56,109.47 R34.1 | 36.32,105.66 36.32,100.84 C1.1 | 32.13,101.73 36.07,105.66 36.32,105.66 | 32.13,101.73 30.99,100.58 C8.2 30.73,100.33 30.73,96.01 C11.2 30.99,95.76 30.99,88.9 v33.02,86.87 | 7.62,104.14 4.06,104.14 V15.2 | 7.62,104.14 HB_LEFT.1 HB_LEFT.14 | 7.62,104.14 SENSOR/SERVO.1 | C5.2 58.17,98.81 58.17,102.87 C4.2 58.17,103.12 58.17,109.22 C10.- 57.66,109.47 51.31,115.82 X1.1.2
  Top 1.016: X1.1.2 52.32,117.35 52.32,120.4 X1.1.1 | v42.67,98.55 42.67,98.3 41.4,97.03 C16.2 | v46.23,99.06 46.48,99.31 46.48,100.84 C7.2 46.99,101.35 48.51,102.87 48.51,106.93 5V_DC.GND 49.78,108.2 49.78,114.81 X1.1.2 | v51.31,99.82 53.85,99.82 C9.1 | v32.26,101.6 32.13,101.73 | v31.75,70.1 31.5,70.1
  Bottom 1.016: v83.31,23.37 v79.25,23.37 78.99,23.11 v76.2,23.11 75.95,22.86 74.17,22.86 72.14,20.83 66.55,20.83 v64.26,23.11 v51.05,23.11 | PORT_D.1 55.63,77.47 55.63,80.77 v58.93,84.07 58.93,83.57 70.61,83.57 70.61,80.77 69.85,80.01 PORT_D.10 | v21.34,24.38 20.32,23.37 v18.8,23.37 19.3,23.11 19.3,18.29 20.07,17.53 v33.02,17.53 34.04,16.51 v42.67,16.51 | v41.4,48.77 39.37,48.77 v37.85,47.24 v22.61,47.24 | 44.45,54.86 44.2,55.12 41.66,55.12 U$6.CASE2 | 44.45,54.86 46.99,52.32 U$6.L/R- | 44.45,54.86 44.7,55.12 57.4,55.12 U$6.CASE4 57.91,54.86 61.21,51.56 73.15,51.56 RN1.1 | v23.88,77.47 27.43,77.47 | 27.43,77.47 PORT_A.1 | v36.83,84.84 35.56,83.57 33.27,83.57 | 33.27,83.57 27.43,77.72 27.43,77.47 | v51.31,99.82 50.8,99.31 46.48,99.31 v46.23,99.06 43.18,99.06 v42.67,98.55 39.88,101.35 32.26,101.35 | SENSOR/SERVO.1 7.62,101.35 32.26,101.35 | v32.26,101.6 32.26,101.35 | U$1.CASING2 67.06,120.9 66.8,120.65 52.58,120.65 X1.1.1 | v33.02,86.87 33.02,83.82 33.27,83.57 | HB_RIGHT.1 76.2,100.84 79.76,97.28 95,97.28 95.25,97.03 GND.MP | v31.75,70.1 40.64,70.1 41.4,69.34 U$6.CASE1
  other vias: 2.54,97.79 2.54,3.81 95.25,3.81
  pour Bottom: -2.54,125.73 -2.54,-2.54 102.87,-2.54 102.87,125.73
  pour Top: -3.81,127 -3.81,-5.08 105.41,-5.08 105.41,127
N$1  (via drill 0.51)
  Top 0.508: v19.56,61.98 20.57,62.99 RGB1.1 | v15.24,61.98 13.97,63.25 R19.2
  Bottom 0.508: v15.24,61.98 v19.56,61.98
N$2
  Top 0.508: RGB1.2 21.59,58.42 25.65,54.36 27.43,54.36 27.94,54.86 27.94,69.6 25.4,72.14 R18.2
N$3
  Top 0.508: F2.1 70.61,111.76 72.64,113.79 72.64,117.6 U$1.1
N$4  (via drill 0.51)
  Top 0.508: v8.89,113.28 8.89,117.35 6.86,119.38 H9.A | LED-WEISS.2 85.34,107.95 89.92,112.52 89.92,115.82 93.47,119.38 H10.A
  Bottom 0.508: v8.89,113.28 10.16,112.01 46.48,112.01 48.51,109.98 77.72,109.98 80.26,107.44 80.26,98.3 83.57,98.3 LED-WEISS.2
N$5
  Top 0.508: H2.C 68.33,7.62 68.33,12.7 R26.2
N$6
  Top 0.508: H1.C 74.68,7.62 74.68,12.7 R25.2
N$7
  Top 0.508: V1.3 80.01,19.05 77.72,16.76 77.72,12.7 R25.1
N$8
  Top 0.508: V2.3 75.95,19.05 71.37,14.48 71.37,12.7 R26.1
N$9
  Top 1.016: F1.2 28.45,108.97 24.13,104.65 24.13,100.58 23.88,100.33 D1.A
N$10
  Top 0.508: R36.2 96.52,119.13 96.77,119.38 H10.C
N$11
  Top 0.508: RGB1.3 22.61,62.99 26.42,59.18 26.42,55.88 R17.2
N$12  (via drill 0.51)
  Top 0.508: v75.44,46.99 75.44,39.37 75.95,38.86 R15.2
  Bottom 0.508: v75.44,46.99 74.68,47.75 65.28,47.75 LCD-POWER.2
N$13  (via drill 0.51)
  Top 0.508: v79.5,8.89 78.23,7.62 H1.A 77.98,7.37 77.98,5.84 73.41,5.84 71.88,7.37 H2.A 71.63,7.37 69.6,5.33 63.5,5.33 63.37,5.46 | 39.88,5.84 35.31,5.84 33.78,7.37 H8.A | 39.88,5.84 39.88,7.37 H7.A | 39.88,5.84 39.88,5.33 44.2,5.33 46.23,7.37 H6.A 46.48,7.37 48.01,5.84 52.58,5.84 52.58,7.37 H5.A 52.83,7.37 54.36,5.84 58.93,5.84 | 58.93,5.84 58.93,7.37 H4.A | 63.37,5.46 63.25,5.33 58.93,5.33 58.93,5.84 | 63.37,5.46 65.28,7.37 H3.A
  Bottom 0.508: LED-POWER.2 80.26,8.89 v79.5,8.89
N$14  (via drill 0.51)
  Top 0.508: v88.39,50.8 90.42,52.83 90.42,56.39 RS232_BT.2
  Bottom 0.508: RN1.5 84.84,50.8 v88.39,50.8
N$15
  Bottom 0.508: RN1.4 83.06,53.85 94.74,53.85 95.5,54.61 95.5,57.66 RS232_BT.4
N$16  (via drill 0.51)
  Top 0.508: 17.02,86.61 17.02,81.79 17.53,81.28 R21.2 | 17.02,86.61 17.02,87.38 19.05,87.38 V12.3 | v15.49,86.61 17.02,86.61
  Bottom 0.508: v15.49,86.61 6.1,86.61 SG1.-
N$17  (via drill 0.51)
  Top 0.508: v27.94,39.62 27.94,38.1 R43.1 | v34.8,43.43 34.8,44.96 IC3.6 | v6.35,32.51 6.35,15.75 5.08,14.48 S5.16
  Bottom 0.508: v34.8,43.43 31.75,43.43 v27.94,39.62 13.46,39.62 v6.35,32.51
N$18  (via drill 0.51)
  Top 0.508: v29.21,39.62 29.21,35.56 27.94,34.29 R23.1 | v33.78,42.42 33.78,44.96 IC3.5 | v9.91,37.34 9.91,16.76 7.62,14.48 S5.15
  Bottom 0.508: v29.21,39.62 32,42.42 v33.78,42.42 35.81,42.42 35.81,43.69 35.05,44.45 17.02,44.45 v9.91,37.34
N$19  (via drill 0.51)
  Top 0.508: LS.E 96.01,5.84 89.92,5.84 89.15,5.08 82.04,5.08 82.04,7.37 83.57,8.89 LS_POTI.1 83.57,9.14 83.57,19.05 82.04,20.57 82.04,28.45 v78.99,31.5 | v66.55,43.94 66.55,48.77 65.53,49.78 65.53,53.85 65.02,54.36 R20.2
  Bottom 0.508: v78.99,31.5 v66.55,43.94
N$20
  Top 0.508: 89.41,7.62 89.41,35.31 82.55,42.16 82.55,52.83 80.77,54.61 R22.2 | 89.41,7.62 89.41,6.35 83.82,6.35 LS_POTI.3 | 89.41,7.62 LS_POTI.2
N$21
  Top 0.508: 14.73,30.73 14.73,31.5 R1.2 14.73,30.73 | 14.73,30.73 14.73,27.18 14.48,26.92 R3.2 | 8.64,39.88 8.64,41.15 S1.1 | 8.64,39.88 8.64,32.51 S1.2 | 14.73,30.73 11.68,30.73 11.68,35.31 11.94,35.56 11.94,36.58 8.64,39.88
N$22  (via drill 0.51)
  Top 0.508: R2.2 62.23,38.1 62.23,34.29 R4.2 v60.2,34.29 | S2.2 8.64,19.81 8.64,28.45 S2.1 8.64,28.7 8.64,30.23 v8.89,30.48
  Bottom 0.508: v60.2,34.29 59.69,33.78 43.69,33.78 42.67,32.77 11.18,32.77 v8.89,30.48
N$23  (via drill 0.51)
  Top 0.508: 91.69,26.67 91.69,28.45 S4.3 | 91.69,26.67 91.69,19.81 S4.4 | v59.69,25.4 R10.1 | R7.1 v74.42,26.67 | v90.42,26.67 91.69,26.67
  Bottom 0.508: v59.69,25.4 60.96,26.67 v74.42,26.67 v90.42,26.67
N$24  (via drill 0.51)
  Top 0.508: R6.1 68.58,34.29 70.1,32.77 70.1,31.75 73.15,31.75 R9.1 v73.15,30.23 | S3.3 91.69,41.15 91.69,32.51 S3.4 91.69,32.26 91.69,31.75 v90.42,30.48
  Bottom 0.508: v73.15,30.23 73.41,30.48 v90.42,30.48
N$25
  Top 0.508: H4.C 55.63,7.62 55.63,12.7 R28.2
N$26
  Top 0.508: H3.C 61.98,7.62 61.98,12.7 R27.2
N$27
  Top 0.508: V9.3 31.75,66.04 30.48,64.77 30.48,56.9 29.46,55.88 R17.1
N$28
  Top 0.508: R18.1 V10.3
N$29  (via drill 0.51)
  Top 0.508: v20.32,73.91 20.32,74.68 19.05,74.68 V11.3 | v14.22,67.82 13.97,67.56 R19.1
  Bottom 0.508: v14.22,67.82 v20.32,73.91
N$30
  Top 0.508: V3.3 63.5,19.05 64.77,17.78 64.77,12.7 R27.1
N$31
  Top 0.508: IC3.4 32.51,44.96 32.77,44.7 32.77,39.37 34.04,38.1 R24.1 34.29,38.1 35.56,36.83 35.56,33.27 34.8,32.51 34.8,23.62 31.75,20.57 31.75,4.06 4.32,4.06 4.06,4.32 4.06,8.13 10.16,14.22 S5.14
N$32
  Top 0.508: V4.3 57.15,19.05 58.42,17.78 58.42,12.7 R28.1
N$33
  Top 0.508: R37.2 3.05,119.13 3.3,119.38 H9.C
N$34  (via drill 0.51)
  Top 0.508: v20.07,26.92 20.07,25.91 LCD1.3 | v7.37,26.92 7.37,46.74 7.87,47.24 7.87,49.02 6.1,50.8 LCD_POTI.1
  Bottom 0.508: v7.37,26.92 v20.07,26.92
N$35  (via drill 0.51)
  Top 0.508: v37.59,91.44 41.91,91.44 42.16,91.19 42.16,90.93 43.69,90.93 IC1.27 | v34.04,93.73 34.8,94.49 34.8,96.77 L1.2 35.05,97.03 v35.05,102.62 | v38.86,102.62 38.86,101.09 39.12,100.84 C1.2
  Bottom 0.508: v37.59,91.44 36.32,91.44 v34.04,93.73 | v35.05,102.62 v38.86,102.62
N$36  (via drill 0.51)
  Top 0.508: v53.85,91.69 55.12,91.69 IC1.8 | v59.44,92.71 59.94,93.22 59.94,97.54 | 59.94,97.54 59.94,98.55 C5.1 | 59.94,97.54 Q1.1
  Bottom 0.508: v53.85,91.69 54.86,92.71 57.91,92.71 58.17,92.96 59.18,92.96 v59.44,92.71
N$37
  Top 0.508: IC1.7 55.37,90.93 56.64,90.93 56.9,90.68 59.44,90.68 C3.2 59.44,90.93 60.45,90.93 60.71,91.19 64.77,91.19 Q1.2
N$38  (via drill 0.51)
  Top 0.508: v45.21,90.42 45.21,89.41 43.94,89.41 IC1.29 | v52.58,104.14 53.85,102.87 C9.2
  Bottom 0.508: v45.21,90.42 41.91,93.73 40.39,93.73 38.86,95.25 7.87,95.25 2.03,101.09 2.03,104.14 v52.58,104.14
N$39  (via drill 0.51)
  Top 0.508: v26.42,31.75 23.62,31.75 LCD1.6 | v42.42,30.73 42.93,30.23 42.93,25.4 R14.2 | v55.37,32.77 55.37,34.04 55.63,34.29 R11.1
  Bottom 0.508: v26.42,31.75 27.43,30.73 v42.42,30.73 53.34,30.73 v55.37,32.77
N$40  (via drill 0.51)
  Top 0.508: v28.45,29.72 20.32,29.72 LCD1.5 | v49.28,28.7 50.55,27.43 50.55,25.4 R16.2 | v54.36,30.48 54.36,36.83 55.63,38.1 R13.1
  Bottom 0.508: v28.45,29.72 29.46,28.7 v49.28,28.7 52.58,28.7 v54.36,30.48
N$41
  Top 0.508: R37.1 V15.3
N$42
  Top 0.508: H6.C 42.93,7.62 42.93,12.7 R30.2
N$43
  Top 0.508: H5.C 49.28,7.62 49.28,12.7 R29.2
N$44
  Top 0.508: V5.3 52.07,12.7 R29.1
N$45
  Top 0.508: V6.3 46.99,19.05 45.97,18.03 45.97,12.7 R30.1
N$46
  Top 0.508: R36.1 V14.3
N$47
  Top 1.016: HB_LEFT.12 11.43,115.57 VL_.1
N$48
  Top 0.508: H8.C 30.23,7.62 30.23,12.7 R32.2
N$49
  Top 0.508: H7.C 36.58,7.62 36.58,12.7 R31.2
N$50
  Top 0.508: V7.3 41.91,19.05 41.4,18.54 41.4,14.48 39.62,12.7 R31.1
N$51
  Top 0.508: V8.3 36.83,19.05 33.27,15.49 33.27,12.7 R32.1
N$52
  Top 1.016: HB_LEFT.11 13.97,115.57 VL_.2
N$53
  Top 1.016: HB_LEFT.10 19.05,115.57 HL_.1
N$54
  Top 1.016: HB_LEFT.9 21.59,115.57 HL_.2
N$55
  Top 1.016: HB_RIGHT.12 80.01,115.57 VR_.1
N$56
  Top 1.016: HB_RIGHT.11 82.55,115.57 VR_.2
N$57
  Top 1.016: HB_RIGHT.10 87.63,115.57 HR_.1
N$58
  Top 1.016: HB_RIGHT.9 88.9,117.86 90.17,119.13 HR_.2
N$59
  Top 0.508: IC3.3 31.24,44.96 31.24,44.2 32,43.43 32,37.85 33.78,36.07 33.78,34.54 34.04,34.29 R35.1 33.78,34.29 33.78,23.62 28.96,18.8 28.96,11.94 14.99,11.94 12.7,14.22 S5.13
N$60
  Top 0.508: +5V-POWER.A 59.44,120.65 59.44,115.57 R8.1
N$61  (via drill 0.51)
  Top 0.508: v40.13,50.04 40.13,39.62 41.66,38.1 R38.1 | v32.26,49.53 31.24,50.55 31.24,51.31 IC3.14 | v18.8,49.53 18.8,37.59 16.26,35.05 16.26,30.48 16,30.23 16,15.24 15.24,14.48 S5.12
  Bottom 0.508: v40.13,50.04 39.62,50.55 33.27,50.55 v32.26,49.53 v18.8,49.53
N$62  (via drill 0.51)
  Top 0.508: v39.37,55.37 39.37,54.61 39.12,54.36 39.12,36.83 41.66,34.29 R39.1 41.4,34.29 41.4,25.91 v41.15,25.65 | v34.54,55.88 32.51,53.85 32.51,51.56 IC3.13 | v20.57,18.8 20.57,17.27 17.78,14.48 S5.11
  Bottom 0.508: v39.37,55.37 38.86,55.88 v34.54,55.88 | v20.57,18.8 21.84,20.07 35.56,20.07 v41.15,25.65
N$63  (via drill 0.51)
  Top 0.508: v48.26,36.32 48.26,37.08 49.28,38.1 R40.1 | v32.77,35.56 32,34.8 32,29.72 30.86,28.57 | 30.86,28.57 24.38,22.1 24.38,13.46 23.62,12.7 20.32,12.7 S5.10 | v33.53,53.59 33.53,51.56 IC3.12 | v27.94,53.59 23.88,53.59 23.88,37.34 26.42,34.8 26.42,33.02 30.86,28.57
  Bottom 0.508: v48.26,36.32 47.5,35.56 v32.77,35.56 | v27.94,53.59 v33.53,53.59
N$64  (via drill 0.51)
  Top 0.508: v48.26,26.42 48.26,33.27 49.28,34.29 R41.1 | v23.37,21.08 22.86,20.57 S5.9 | v34.54,49.53 34.54,51.05 34.8,51.31 IC3.11
  Bottom 0.508: v48.26,26.42 48.01,26.67 28.96,26.67 28.07,25.78 | v23.37,21.08 28.07,25.78 | v34.54,49.53 33.53,48.51 17.53,48.51 4.83,35.81 4.83,25.91 27.94,25.91 28.07,25.78
N$65  (via drill 1.02)
  Top 1.016: v19.56,83.57 20.07,83.06 20.07,81.53 20.32,81.28 R21.1 | PIEZO-POWER.2 11.94,76.71 11.94,84.84 SG1.+
  Bottom 1.016: v19.56,83.57 18.29,84.84 12.19,84.84 SG1.+
N$66  (via drill 0.51)
  Top 0.508: v35.56,54.86 35.56,56.9 34.29,58.17 R12.1 | v38.35,54.86 38.35,52.32 37.59,51.56 IC3.9
  Bottom 0.508: v38.35,54.86 v35.56,54.86
N$70  (via drill 0.51)
  Top 0.508: v65.02,64.77 65.02,65.53 65.28,65.79 IC2.4 | v78.49,62.74 80.26,60.96 C17.1
  Bottom 0.508: v65.02,64.77 67.06,62.74 v78.49,62.74
N$75  (via drill 1.02)
  Top 1.016: D2.C 19.56,92.71 19.56,100.33 D1.C 19.81,100.58 20.57,101.35 20.57,104.39 21.59,105.41 21.59,107.95 22.35,108.71 25.65,108.71 v25.65,108.2 | v32.51,106.43 32.51,104.9 27.94,100.33 C8.1
  Bottom 1.016: 5V_DC.IN 34.04,107.95 v32.51,106.43 32.26,106.68 27.18,106.68 v25.65,108.2
N$88  (via drill 0.51)
  Top 0.508: 21.59,66.55 20.83,66.55 RGB1.6 | 21.59,66.55 22.35,66.55 RGB1.4 22.61,66.55 23.62,66.55 23.88,66.8 26.92,66.8 v26.92,61.72 | 21.59,66.55 RGB1.5
  Bottom 0.508: v26.92,61.72 22.61,57.4 8.89,57.4 RGB-POWER.2
N$95
  Top 0.508: LCD1.17 86.87,23.88 85.09,25.65 85.09,30.48 79.25,36.32 79.25,38.86 R15.1
PA0  (via drill 0.51)
  Top 0.508: v47.5,64.26 47.5,81.03 48.01,81.53 48.01,84.33 IC1.37 | PORT_A.2 29.46,77.72 v29.46,63.5
  Bottom 0.508: v47.5,64.26 45.47,62.23 U$6.U/D_M 30.73,62.23 v29.46,63.5
PA1  (via drill 0.51)
  Top 0.508: v47.24,89.15 47.24,84.58 IC1.36 | v35.81,89.15 35.56,88.9 35.56,78.74 35.18,78.36 | PORT_A.3 35.18,78.36 | v45.21,63.25 45.21,56.64 49.53,52.32 U$6.L/R_M | v36.32,68.58 35.31,69.6 35.31,78.23 35.18,78.36
  Bottom 0.508: v47.24,89.15 46.99,88.9 36.07,88.9 v35.81,89.15 | v45.21,63.25 42.67,65.79 40.64,65.79 37.85,68.58 v36.32,68.58
PA2  (via drill 0.51)
  Top 0.508: v72.9,56.13 72.9,55.12 75.44,55.12 C19.2 | v68.58,56.13 67.82,55.37 67.82,54.61 R20.1 67.56,54.36 v67.56,52.83 | IC1.35 46.23,84.33 v46.23,82.8 46.23,78.99 v46.48,78.74 | v61.72,58.67 60.96,59.44 60.96,72.64 59.44,74.17 v59.44,75.69
  Bottom 0.508: v68.58,56.13 v72.9,56.13 | v46.23,82.8 44.96,81.53 35.81,81.53 PORT_A.4 | v61.72,58.67 v67.56,52.83 | v59.44,75.69 59.18,75.44 50.29,75.44 46.99,78.74 v46.48,78.74
PA3  (via drill 0.51)
  Top 0.508: v45.21,77.47 45.21,84.07 45.47,84.33 IC1.34 | SENSOR/SERVO.3 14.48,97.28 14.48,78.99 v15.75,77.72
  Bottom 0.508: v45.21,77.47 43.94,76.2 38.1,76.2 37.97,76.33 | PORT_A.5 37.97,76.33 | v15.75,77.72 17.27,76.2 37.85,76.2 37.97,76.33
PA4  (via drill 0.51)
  Top 0.508: 37.85,119.63 40.64,119.63 R33.1 | 37.85,119.63 35.56,119.63 R34.2 | v42.16,84.58 43.69,86.11 IC1.33 | 37.85,119.63 37.85,99.82 36.58,98.55 36.07,98.55 36.07,93.73 34.54,92.2 v34.54,82.3
  Bottom 0.508: v42.16,84.58 39.88,82.3 34.8,82.3 34.67,82.17 | 34.67,82.17 33.02,80.52 33.02,78.74 35.56,78.74 PORT_A.6 | v34.54,82.3 34.67,82.17
PA5  (via drill 0.51)
  Top 0.508: v42.16,86.87 43.69,86.87 IC1.32 | v38.35,86.87 37.85,86.36 37.85,85.6 38.1,85.34 38.1,78.74 PORT_A.7 39.12,77.47 37.34,75.69 v37.34,53.85 | v27.43,52.58 27.43,46.23 28.45,45.21 IC3.1
  Bottom 0.508: v38.35,86.87 v42.16,86.87 | v27.43,52.58 36.07,52.58 v37.34,53.85
PA6  (via drill 0.51)
  Top 0.508: v45.21,87.12 45.21,87.63 43.94,87.63 IC1.31 | v38.86,85.85 39.12,85.6 39.12,80.26 PORT_A.8 40.64,78.74 40.64,74.17 v38.35,71.88 | v24.89,50.55 24.89,43.69 29.21,43.69 29.46,43.94 29.46,44.7 29.72,44.96 IC3.2
  Bottom 0.508: v45.21,87.12 43.94,85.85 v38.86,85.85 | v24.89,50.55 21.34,54.1 7.11,54.1 5.08,56.13 5.08,61.72 12.45,61.72 22.61,71.88 v38.35,71.88
PA7  (via drill 0.51)
  Top 0.508: v46.23,85.85 46.23,88.65 43.94,88.65 IC1.30 | v34.29,74.93 R12.2
  Bottom 0.508: v46.23,85.85 50.29,81.79 50.29,79.5 46.99,79.5 46.74,79.76 44.45,79.76 44.32,79.63 | 44.32,79.63 42.16,77.47 PORT_A.9 | v34.29,74.93 34.8,75.44 44.45,75.44 46.23,77.22 46.23,77.72 44.32,79.63
PB0  (via drill 0.51)
  Top 0.508: v81.28,20.07 81.28,21.08 81.03,21.34 V1.1 | v21.84,18.8 21.59,19.05 21.59,22.35 18.54,25.4 18.54,30.73 17.78,31.5 R1.1 | v53.85,85.85 50.8,85.85 50.29,85.34 50.29,84.58 IC1.40 | v89.41,86.87 92.71,83.57 92.71,67.82 95.5,65.02 95.5,43.18 93.98,41.66 v93.98,28.96
  Bottom 0.508: v21.84,18.8 80.01,18.8 v81.28,20.07 85.09,20.07 v93.98,28.96 | v53.85,85.85 54.36,86.36 78.49,86.36 78.99,86.87 v89.41,86.87
PB1  (via drill 0.51)
  Top 0.508: v77.47,31.5 77.47,22.1 76.96,21.59 V2.1 | v66.29,36.83 65.02,38.1 R2.1 64.77,38.1 64.77,39.37 64.01,40.13 64.01,48.77 62.74,50.04 62.74,66.04 v61.98,66.8 | v50.29,71.88 50.55,72.14 50.55,75.18 50.29,75.44 50.29,76.96 51.05,77.72 51.05,84.33 IC1.41
  Bottom 0.508: v77.47,31.5 72.14,36.83 v66.29,36.83 | v50.29,71.88 56.39,65.79 58.42,65.79 59.44,66.8 v61.98,66.8
PB2  (via drill 0.51)
  Top 0.508: v71.88,33.27 73.15,34.54 R9.2 | V3.1 64.52,21.59 65.53,22.61 v65.53,29.72 63.5,31.75 63.5,39.62 61.21,39.62 60.71,39.12 60.71,36.58 57.66,36.58 57.15,37.08 57.15,50.04 51.05,56.13 51.05,59.94 51.31,60.2 51.31,75.44 51.05,75.69 51.05,76.71 51.82,77.47 51.82,84.33 IC1.42
  Bottom 0.508: v65.53,29.72 69.09,33.27 v71.88,33.27
PB3  (via drill 0.51)
  Top 0.508: V4.1 58.17,21.59 60.96,24.38 60.96,25.4 R10.2 61.21,25.4 61.21,28.19 v61.47,28.45 | v53.09,60.71 53.09,76.71 52.83,76.96 52.83,84.33 IC1.43 | v66.29,57.4 66.29,50.04 67.56,48.77 67.56,35.81 66.55,34.8 v66.55,33.53
  Bottom 0.508: v53.09,60.71 54.1,59.69 64.01,59.69 v66.29,57.4 | v61.47,28.45 v66.55,33.53
PB4  (via drill 0.51)
  Top 0.508: v53.59,52.32 53.59,33.27 52.07,31.75 52.07,24.38 52.32,24.13 52.32,22.1 52.83,21.59 V5.1 | v55.37,53.85 54.1,55.12 54.1,83.82 53.59,84.33 IC1.44
  Bottom 0.508: v53.59,52.32 55.12,53.85 v55.37,53.85
PB5  (via drill 0.51)
  Top 0.508: v49.53,21.34 48.01,21.34 V6.1 | v72.9,19.81 73.41,20.32 73.41,29.21 74.68,30.48 74.68,46.48 70.61,50.55 v70.61,57.15 | v56.13,61.21 55.37,61.98 55.37,86.11 IC1.1
  Bottom 0.508: v49.53,21.34 51.05,19.81 v72.9,19.81 | v70.61,57.15 66.55,61.21 v56.13,61.21
PB6  (via drill 0.51)
  Top 0.508: v43.18,34.54 43.18,33.27 44.45,32 44.45,23.11 42.93,21.59 V7.1 | v68.58,40.64 69.6,41.66 69.6,75.69 69.34,75.95 v69.34,81.28 | v58.93,82.3 56.64,84.58 56.64,86.61 56.39,86.87 55.37,86.87 IC1.2
  Bottom 0.508: v43.18,34.54 59.18,34.54 65.28,40.64 v68.58,40.64 | v69.34,81.28 68.33,82.3 v58.93,82.3
PB7  (via drill 0.51)
  Top 0.508: v40.39,17.78 40.39,18.8 37.85,21.34 V8.1 | v92.96,26.67 92.96,59.44 83.82,68.58 v83.82,90.17 | v57.91,89.41 56.39,87.88 55.37,87.88 IC1.3
  Bottom 0.508: v40.39,17.78 40.64,18.03 84.33,18.03 v92.96,26.67 | v83.82,90.17 62.23,90.17 61.21,89.15 58.17,89.15 v57.91,89.41
PC0  (via drill 0.51)
  Top 0.508: v48.26,85.85 48.26,93.22 48.01,93.47 48.01,95.76 IC1.19 | v52.07,59.69 v52.07,76.45 | v58.67,58.67 59.44,57.91 59.44,38.86 58.67,38.1 R13.2
  Bottom 0.508: v48.26,85.85 48.26,84.84 52.07,81.03 v52.07,76.45 | v52.07,59.69 53.09,58.67 v58.67,58.67
PC1  (via drill 0.51)
  Top 0.508: v15.49,35.56 13.46,37.59 13.46,50.29 12.45,51.31 12.45,67.31 13.72,68.58 13.72,85.6 11.43,87.88 11.43,107.7 16.26,112.52 16.26,121.16 41.4,121.16 42.16,120.4 42.16,118.11 39.62,118.11 39.12,117.6 39.12,115.32 42.93,115.32 44.96,113.28 44.96,98.55 45.72,97.79 46.23,97.79 46.99,97.03 46.99,96.27 47.24,96.01 IC1.20 | v57.15,35.56 58.42,34.29 R11.2
  Bottom 0.508: v15.49,35.56 17.27,37.34 55.37,37.34 v57.15,35.56
PC2  (via drill 0.51)
  Top 0.508: v47.24,92.96 47.24,94.23 46.23,95.25 46.23,95.76 IC1.21 | v88.65,92.71 96.77,84.58 96.77,72.39 95.76,71.37 JTAG.1
  Bottom 0.508: v47.24,92.96 47.75,93.47 57.66,93.47 57.91,93.73 67.82,93.73 68.83,92.71 v88.65,92.71
PC3  (via drill 0.51)
  Top 0.508: v44.96,97.28 44.96,96.52 45.47,96.01 IC1.22 | v72.64,97.28 79.25,90.68 v79.25,85.85
  Bottom 0.508: v44.96,97.28 45.47,96.77 54.1,96.77 54.61,97.28 v72.64,97.28 | v79.25,85.85 95.5,85.85 96.77,84.58 96.77,74.17 95.76,74.17 JTAG.5
PC4  (via drill 0.51)
  Top 0.508: v43.18,95.25 43.18,94.74 43.69,94.23 IC1.23 | v45.97,94.23 46.23,93.98 v46.23,92.2 | v49.28,89.15 49.78,88.65 v49.78,87.12
  Bottom 0.508: v43.18,95.25 44.2,94.23 v45.97,94.23 | v49.28,89.15 v46.23,92.2 | v49.78,87.12 76.45,87.12 76.96,87.63 88.9,87.63 89.15,87.88 93.98,87.88 95.25,86.61 95.76,86.61 97.54,84.84 97.54,72.9 95.76,72.9 JTAG.3
PC5  (via drill 0.51)
  Top 0.508: v39.88,97.54 38.61,96.27 38.61,92.2 39.88,92.2 40.64,92.96 40.64,93.47 43.69,93.47 IC1.24 | v43.69,97.28 43.94,97.54 v43.94,113.03 | v89.66,90.42 93.73,86.36 93.73,78.74 95.76,76.71 JTAG.9
  Bottom 0.508: v39.88,97.54 40.13,97.28 v43.69,97.28 | v43.94,113.03 45.21,114.3 73.91,114.3 75.69,116.08 91.95,116.08 97.54,110.49 97.54,90.42 v89.66,90.42
PC6  (via drill 0.51)
  Top 0.508: 41.4,94.74 42.67,96.01 42.67,96.27 43.43,96.27 44.96,94.74 44.96,92.71 43.94,92.71 IC1.25 | v39.62,93.22 39.88,93.47 39.88,93.73 40.89,94.74 41.4,94.74 | 41.4,94.74 C16.1
  Bottom 0.508: Q2.2 37.34,93.22 v39.62,93.22
PC7  (via drill 0.51)
  Top 0.508: v41.91,92.46 42.67,91.69 43.69,91.69 IC1.26 | Q2.1 C15.1
  Bottom 0.508: v41.91,92.46 39.62,90.17 Q2.1
PD0  (via drill 0.51)
  Top 0.508: v57.15,91.69 57.15,92.46 55.37,92.46 IC1.9 | v60.96,90.17 60.71,89.92 60.71,82.8 58.29,80.39 | 58.29,80.39 57.91,80.01 PORT_D.2 | v59.94,64.77 59.69,65.02 59.69,72.9 58.42,74.17 58.42,80.26 58.29,80.39
  Bottom 0.508: v57.15,91.69 58.67,90.17 v60.96,90.17 | RS232_BT.3 92.96,56.39 73.91,56.39 68.33,61.98 62.74,61.98 v59.94,64.77
PD1  (via drill 0.51)
  Top 0.508: v57.4,96.27 57.4,93.47 55.37,93.47 IC1.10 | v68.33,96.27 67.06,95 67.06,81.53 66.04,80.52 v66.04,79.5 66.04,75.95 63.5,73.41 63.5,58.93 v63.75,58.67
  Bottom 0.508: v68.33,96.27 v57.4,96.27 | v66.04,79.5 65.28,78.74 60.96,78.74 PORT_D.3 | RS232_BT.1 67.31,55.12 v63.75,58.67
PD2  (via drill 0.51)
  Top 0.508: v58.42,91.95 58.42,97.28 57.15,97.28 56.39,96.52 56.39,95.25 55.37,94.23 IC1.11 | HB_RIGHT.5 86.61,106.43 86.61,96.52 v81.79,91.69 82.04,91.69 82.04,85.09 v81.79,84.84 | PORT_D.4 63.25,83.57 v63.25,84.84
  Bottom 0.508: v58.42,91.95 58.67,91.69 v81.79,91.69 | HB_RIGHT.3 83.06,108.46 84.58,108.46 HB_RIGHT.5 | v81.79,84.84 v63.25,84.84
PD3  (via drill 0.51)
  Top 0.508: v54.61,96.01 53.59,96.01 IC1.12 | v17.53,100.08 17.78,100.33 HB_LEFT.5 | v70.36,95.25 v70.36,76.2
  Bottom 0.508: v17.53,100.08 36.07,100.08 39.62,96.52 43.18,96.52 43.69,96.01 v54.61,96.01 55.37,95.25 v70.36,95.25 | HB_LEFT.3 14.48,108.46 16,108.46 HB_LEFT.5 | PORT_D.5 63.5,76.2 v70.36,76.2
PD4  (via drill 0.51)
  Top 0.508: v33.27,73.91 33.27,69.09 32.77,68.58 V9.1 | v60.96,73.91 60.96,78.74 PORT_D.6 | v52.83,94.49 52.83,95.76 IC1.13 | v68.07,81.28 68.58,81.79 v68.58,94.23
  Bottom 0.508: v60.96,73.91 v33.27,73.91 | 68.58,94.49 69.85,94.49 70.1,94.23 94.74,94.23 96.77,96.27 96.77,108.46 90.68,108.46 HB_RIGHT.6 87.12,104.9 85.6,104.9 HB_RIGHT.4 | 68.58,94.49 v52.83,94.49 | PORT_D.6 63.5,81.28 v68.07,81.28 | 68.58,94.49 v68.58,94.23
PD5  (via drill 0.51)
  Top 0.508: HB_LEFT.4 15.24,93.47 26.16,82.55 V10.1 | v55.63,102.36 55.63,98.55 53.59,98.55 52.07,97.03 52.07,96.27 51.82,96.01 IC1.14 | v71.37,78.74 71.37,96.27 v65.79,101.85
  Bottom 0.508: HB_LEFT.6 21.97,105.03 | 21.97,105.03 22.1,104.9 23.37,104.9 23.62,105.16 52.83,105.16 v55.63,102.36 65.28,102.36 v65.79,101.85 | PORT_D.7 65.28,77.98 66.04,77.98 66.8,78.74 v71.37,78.74 | HB_LEFT.4 17.02,104.9 21.84,104.9 21.97,105.03
PD6  (via drill 0.51)
  Top 0.508: V12.1 18.29,85.09 18.29,83.06 19.05,82.3 19.05,80.26 18.03,79.25 18.03,72.64 V11.1 18.29,72.39 19.05,71.63 v19.05,71.37 | v51.05,97.79 51.05,96.01 IC1.15 | v66.55,99.82 66.29,99.57 66.29,81.79 64.77,80.26 PORT_D.8 63.5,78.74 63.5,74.42 v61.98,72.9
  Bottom 0.508: v51.05,97.79 53.09,99.82 v66.55,99.82 | v19.05,71.37 20.57,72.9 v61.98,72.9
PD7  (via drill 0.51)
  Top 0.508: 87,94.87 82.8,90.68 v82.8,84.33 | 87,94.87 95.5,103.38 V14.1 | v3.05,101.35 3.05,103.12 2.29,103.89 V15.1 | IC1.16 50.29,95.76 v50.29,94.49 51.05,93.73 51.05,93.47 53.09,93.47 53.85,94.23 53.85,94.49 54.36,95 54.86,95 55.63,95.76 55.63,97.28 v56.64,98.3 | v86.61,95.25 87,94.87
  Bottom 0.508: v82.8,84.33 75.95,77.47 PORT_D.9 | v3.05,101.35 8.38,96.01 39.12,96.01 40.64,94.49 42.67,94.49 43.94,93.22 46.23,93.22 47.5,94.49 v50.29,94.49 | v86.61,95.25 85.6,96.27 74.93,96.27 72.9,98.3 v56.64,98.3
RESET  (via drill 0.51)
  Top 0.508: R5.1 14.73,38.86 16.76,40.89 16.76,44.96 RESET.4 16.76,45.21 16.76,53.85 RESET.3 16.76,54.1 16.26,54.61 16.26,76.96 v17.02,77.72 | v53.34,88.14 54.1,88.14 54.61,88.65 55.12,88.65 IC1.4
  Bottom 0.508: v53.34,88.14 27.43,88.14 v17.02,77.72
V_AKKU  (via drill 1.02)
  Top 1.016: v33.53,116.84 28.7,112.01 F1.1 | X1.2.2 40.64,116.84 R33.2 | v48.26,112.27 48.26,116.59 X1.2.2 | X1.2.1 47.5,120.4 47.5,117.09 X1.2.2
  Bottom 1.016: X1.2.2 v33.53,116.84 33.27,116.59 12.45,116.59 HB_LEFT.13 | HB_RIGHT.13 76.71,112.27 v48.26,112.27
VCC  (via drill 1.02)
  Top 1.016: S3.1 96.27,41.15 96.27,32.77 S3.2 96.27,32.26 96.27,28.7 S4.1 96.27,28.19 96.27,20.07 S4.2 96.01,19.56 96.01,13.97 | 96.01,13.97 LS.C | v95.76,13.97 96.01,13.97 | R8.2 62.48,115.57 63.75,114.3 63.75,109.22 C10.+ 64.26,108.97 67.31,108.97 | C6.1 75.18,100.58 70.61,105.16 70.61,108.46 F2.2 70.1,108.97 67.31,108.97 | 80.52,88.9 80.52,97.79 LED-WEISS.1 82.55,100.33 82.55,102.87 HB_RIGHT.2 | 80.52,88.9 80.52,73.91 0_OHM_A.1 | v80.77,88.9 80.52,88.9 | v67.31,108.71 67.31,108.97 | 40.89,102.87 40.89,109.22 C12.+ 40.64,109.47 v39.37,110.74 | 40.89,102.87 40.89,99.06 39.37,99.06 37.34,97.03 L1.1 | HB_LEFT.2 SENSOR/SERVO.2 9.14,98.04 9.14,76.71 6.6,74.17 6.6,73.91 PIEZO-POWER.1 5.08,72.39 5.08,56.39 5.33,56.13 | 23.88,96.01 C11.1 | 23.88,96.01 23.88,92.71 D2.A | HB_LEFT.7 22.86,102.87 21.84,101.85 21.84,98.04 23.88,96.01 | v32.51,63.5 32.51,56.39 28.7,52.58 28.7,51.56 IC3.16 | S2.4 4.06,19.81 4.06,28.45 S2.3 4.06,28.96 4.06,32.26 S1.4 4.06,32.77 4.06,41.15 S1.3 3.81,41.66 3.3,42.16 3.3,54.1 5.33,56.13 | 5.33,56.13 6.35,57.15 RGB-POWER.1 | 5V_DC.OUT 51.05,106.93 v51.05,102.87 | v41.15,102.87 40.89,102.87
  Bottom 1.016: LED-POWER.1 87.88,13.97 v95.76,13.97 95.25,14.22 95.25,36.07 84.07,47.24 83.57,47.24 78.99,51.82 RN1.3 76.71,50.04 64.52,50.04 62.48,48.01 LCD-POWER.1 62.23,48.26 55.88,48.26 52.07,52.07 U$6.L/R+ 51.82,51.82 50.55,50.55 41.4,50.55 40.39,51.56 28.19,51.56 27.94,51.31 26.92,51.31 26.16,52.07 26.16,59.44 26.42,59.44 28.19,61.21 28.19,62.99 26.92,62.99 26.67,63.25 | HB_RIGHT.7 86.87,102.11 84.58,102.11 82.8,100.33 LED-WEISS.1 | 5V_DC.OUT 52.83,108.71 v67.31,108.71 76.71,108.71 HB_RIGHT.2 | v80.77,88.9 VCC.MP | HB_LEFT.2 12.95,109.47 20.07,109.47 | HB_LEFT.7 20.07,109.47 | v39.37,110.74 38.35,109.73 20.32,109.73 20.07,109.47 | U$6.U/D+ 33.78,64.77 v32.51,63.5 31.24,64.77 28.19,64.77 26.67,63.25 | 26.67,63.25 22.86,59.44 8.38,59.44 6.35,57.4 RGB-POWER.1 | v41.15,102.87 v51.05,102.87

## Text on the board
tNames: + | - | Vcc | GND | Sig | 2 4 6 8 10 | 2 4 6 8 10 | GND | GND | GND | GND | 2 4 6 | BT_CAR V2.1 / Juli 2015 Tü/Rd | Lichtsensor | 7 6 5 4 3 2 1 0